# Altium PCB Booster_Common_Channel_RF.PcbDoc (part 2 of 3)
Units mm, origin at the board's own origin, x right, y up, seen from the top; angles counter-clockwise.
Board outline 159.2 x 28.7 mm, 2 copper layers (Top Layer, Bottom Layer), stack 1.071 mm thick; 192 components, 112 nets, 503 pads, 509 vias.
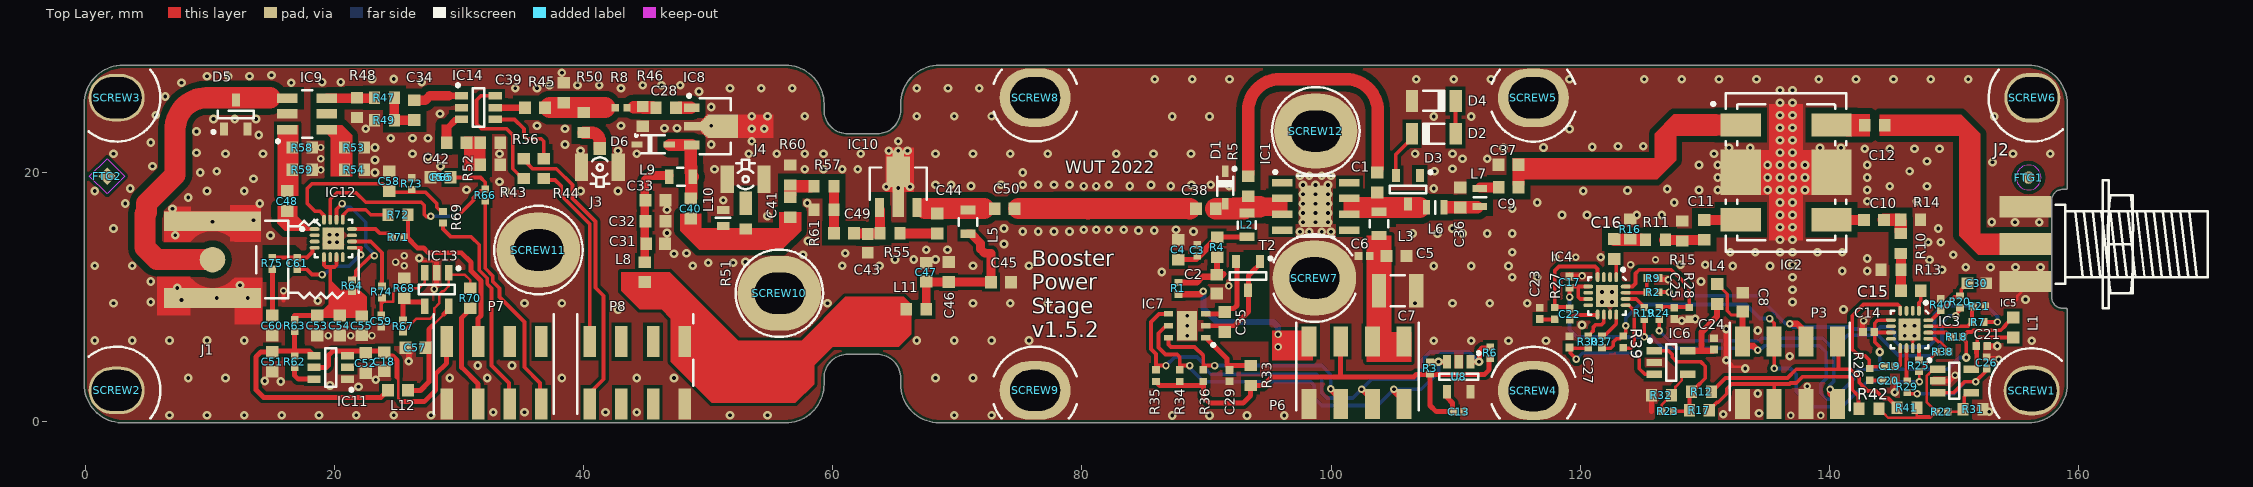
[diagram p0: Top Layer view]

## Part data (continued)
L10: library part IND_330NH_2%_COILCRAFT_0603LS, "Inductor With Core", Case=0603, Manufacturer=COILCRAFT, Manufacturer Part Number=0603LS-331XGL, Power=560mA, Resistance=0R46, Tolerance=±2%, Author="CERN DEM BC", ComponentHeight=1.12mm, Component Type=Standard, CreateDate=29.08.2019, HelpURL=\\cern.ch\dfs\Applications\Altium\Datasheets\IND_COILCRAFT_0603LS.pdf, LatestRevisionDate=29.08.2019, Mounted=Yes, Part Description="SMT Chip Inductor", Part Number=IND_330NH_2%_COILCRAFT_0603LS, Pin Count=2, Sense=No, SMD=Yes, Socket=No, Status=None
P3 P6 P7 P8: library part HDR2X4, "Header, 4-Pin, Dual Row", Manufacturer=-, Package="2x4 pin SMD", Generic=yes, Manufacturer Part Number=ZL264-8DG, Mounting type=SMT, Remarks="ordinary goldpin socket", Supplier 1=TME, Supplier 2=-, Supplier 3=-, Supplier Part Number 1=ZL264-8DG, Supplier Part Number 2=-, Supplier Part Number 3=-
R1 R2 R7 R8 R9 R20 R21 R24 R25 R29 R30 R37 R38 R39 R40 R63 R65 R66 R69 R71 R74 R75: library part R0402_0R_JUMPER, "Resistor", Case=0402, Manufacturer=GENERIC, Manufacturer1 ComponentHeight=0.4mm, Manufacturer1 Example="YAGEO PHYCOMP", Manufacturer1 Part Number=232270591001L, Author="CERN DEM JLC", Component Type=Standard, CreateDate=03.12.2007, HelpURL=\\cern.ch\dfs\Applications\Altium\Datasheets\R0402_Phycomp_RC0402.pdf, LatestRevisionDate=17.10.2012, Manufacturer Part Number=R0402_0R_JUMPER, Mounted=Yes, Part Description="1A (0.05R Max DC Resistance) Zero Ohm Jumper", Part Number=R0402_0R_JUMPER, Pin Count=2, PressFit=No, Sense=No, SMD=Yes, Socket=No, Status="Not Recommended"
R3 R6 R18 R19 R22 R23 R28 R34 R35 R36 R62 R64 R67 R73: library part R0402_10k_1%_0.0625W_100PPM, "Resistor - 1%", Case=0402, Manufacturer=GENERIC, Manufacturer1 ComponentHeight=0.4mm, Manufacturer1 Example="YAGEO PHYCOMP", Manufacturer1 Part Number=232270671003L, Manufacturer Part Number=R0402_10K_1%_0.0625W_100PPM, Power=0.0625W, Tolerance=±1%, Author="CERN DEM JLC", Component Type=Standard, CreateDate=03.12.2007, HelpURL=\\cern.ch\dfs\Applications\Altium\Datasheets\R0402_Phycomp_RC0402.pdf, LatestRevisionDate=17.10.2012, Mounted=Yes, Part Description="General Purpose Thick Film Chip Resistor", Part Number=R0402_10K_1%_0.0625W_100PPM, Pin Count=2, PressFit=No, Sense=No, SMD=Yes, Socket=No, Status="Not Recommended", TC=±100ppm/°C
R4 R33: library part R0603_39R_1%_0.1W_100PPM, "Resistor - 1%", Case=0603, Manufacturer=GENERIC, Manufacturer1 ComponentHeight=0.55mm, Manufacturer1 Example="NIC COMPONENT", Manufacturer1 Part Number=NRC06F39R0TRF, Power=0.1W, Tolerance=±1%, Author="CERN DEM JLC", Component Type=Standard, CreateDate=03.12.2007, HelpURL=\\cern.ch\dfs\Applications\Altium\Datasheets\R0603_NIC_NRC.pdf, LatestRevisionDate=13.03.2008, Manufacturer Part Number=R0603_39R_1%_0.1W_100PPM, Mounted=Yes, Part Description="General Purpose Thick Film Chip Resistor", Part Number=R0603_39R_1%_0.1W_100PPM, Pin Count=2, PressFit=No, Sense=No, SMD=Yes, Socket=No, Status=Preferred, TC=±100ppm/°C
R5: library part R0603_750R_1%_0.1W_100PPM, "Resistor - 1%", Case=0603, Manufacturer=GENERIC, Manufacturer1 ComponentHeight=0.55mm, Manufacturer1 Example="NIC COMPONENT", Manufacturer1 Part Number=NRC06F7500TRF, Power=0.1W, Tolerance=±1%, Author="CERN DEM JLC", Component Type=Standard, CreateDate=03.12.2007, HelpURL=\\cern.ch\dfs\Applications\Altium\Datasheets\R0603_NIC_NRC.pdf, LatestRevisionDate=13.03.2008, Manufacturer Part Number=R0603_750R_1%_0.1W_100PPM, Mounted=Yes, Part Description="General Purpose Thick Film Chip Resistor", Part Number=R0603_750R_1%_0.1W_100PPM, Pin Count=2, PressFit=No, Sense=No, SMD=Yes, Socket=No, Status=Preferred, TC=±100ppm/°C
R10 R11: library part R0603_71R5_1%_0.1W_100PPM, "Resistor - 1%", Case=0603, Manufacturer=GENERIC, Manufacturer1 ComponentHeight=0.50mm, Manufacturer1 Example=VISHAY, Manufacturer1 Part Number=CRCW060371R5FKEA, Power=0.1W, Tolerance=±1%, Author="CERN DEM JLC", Component Type=Standard, CreateDate=11.12.2013, HelpURL="\\cern.ch\dfs\Applications\Altium\Datasheets\R0603_VISHAY_CRCW e3.pdf", LatestRevisionDate=11.12.2013, Manufacturer Part Number=R0603_71R5_1%_0.1W_100PPM, Mounted=Yes, Part Description="General Purpose Thick Film Chip Resistor", Part Number=R0603_71R5_1%_0.1W_100PPM, Pin Count=2, PressFit=No, Sense=No, SMD=Yes, Socket=No, Status=Preferred, TC=±100ppm/°C
R12 R42 R45 R46 R50 R51 R72: library part R0603_NO-VALUE, "Resistor", Case=0603, Author="CERN DEM JLC", Component Type=Standard, CreateDate=03.12.2007, HelpURL=Undefined, LatestRevisionDate=13.03.2008, Manufacturer=Undefined, Manufacturer1 ComponentHeight=Undefined, Manufacturer1 Example=Undefined, Manufacturer1 Part Number=Undefined, Manufacturer Part Number=R0603_NO-VALUE, Mounted=No, Part Description="Reserved Footprint For a 0603 (1608) Chip Resistor", Part Number=R0603_NO-VALUE, Pin Count=2, PressFit=No, Sense=No, SMD=Yes, Socket=No, Status=None
R13 R16: library part R0603_46R4_0.1%_0.063W_10PPM, "Resistor - 0.1%", Case=0603, Manufacturer=GENERIC, Manufacturer1 ComponentHeight=0.5mm, Manufacturer1 Example="TYCO HOLSWORTHY", Manufacturer1 Part Number=RN73C1J46R4BTDF, Power=0.063W, Tolerance=±0.1%, Author="CERN DEM JLC", Component Type=Standard, CreateDate=03.12.2007, HelpURL=\\cern.ch\dfs\Applications\Altium\Datasheets\R0603_Tyco_RN73.pdf, LatestRevisionDate=13.03.2008, Manufacturer Part Number=R0603_46R4_0.1%_0.063W_10PPM, Mounted=Yes, Part Description="Thin Film Chip Resistor", Part Number=R0603_46R4_0.1%_0.063W_10PPM, Pin Count=2, PressFit=No, Sense=No, SMD=Yes, Socket=No, Status="Not Recommended", TC=±10ppm
R14 R15: library part R0603_96R5_0.5%_0.1W_50PPM, "Resistor - 0.5%", Case=0603, Manufacturer=GENERIC, Manufacturer1 ComponentHeight=0.55mm, Manufacturer1 Example=Yaego, Manufacturer1 Part Number=RT0603DRE0796R5L, Power=0.1W, Tolerance=±0.5%, Author=GK, Component Type=Standard, CreateDate=03.12.2007, HelpURL=\\cern.ch\dfs\Applications\Altium\Datasheets\R0603_NIC_NRC.pdf, LatestRevisionDate=13.03.2008, Manufacturer Part Number=R0603_96R5_0.5%_0.1W_50PPM, Mounted=Yes, Part Description="General Purpose Thick Film Chip Resistor", Part Number=R0603_96R5_0.5%_0.1W_50PPM, Pin Count=2, PressFit=No, Sense=No, SMD=Yes, Socket=No, Status=Preferred, TC=±50ppm/°C
R17 R41 R43 R44 R52 R53 R54 R56 R70: library part R0603_100R_1%_0.1W_100PPM, "Resistor - 1%", Case=0603, Manufacturer=GENERIC, Manufacturer1 ComponentHeight=0.55mm, Manufacturer1 Example="NIC COMPONENT", Manufacturer1 Part Number=NRC06F4700TRF, Power=0.1W, Tolerance=±1%, Author="CERN DEM JLC", Component Type=Standard, CreateDate=03.12.2007, HelpURL=\\cern.ch\dfs\Applications\Altium\Datasheets\R0603_NIC_NRC.pdf, LatestRevisionDate=13.03.2008, Manufacturer Part Number=R0603_100R_1%_0.1W_100PPM, Mounted=Yes, Part Description="General Purpose Thick Film Chip Resistor", Part Number=R0603_100R_1%_0.1W_100PPM, Pin Count=2, PressFit=No, Sense=No, SMD=Yes, Socket=No, Status=Preferred, TC=±100ppm/°C
R26 R27: library part R0402_3R9_1%_0.0625W_200PPM, "Resistor - 1%", Case=0402, Manufacturer=GENERIC, Manufacturer1 ComponentHeight=0.4mm, Manufacturer1 Example="YAGEO PHYCOMP", Manufacturer1 Part Number=232270673908L, Power=0.0625W, Tolerance=±1%, Author="CERN DEM JLC", Component Type=Standard, CreateDate=03.12.2007, HelpURL=\\cern.ch\dfs\Applications\Altium\Datasheets\R0402_Phycomp_RC0402.pdf, LatestRevisionDate=17.10.2012, Manufacturer Part Number=R0402_3R9_1%_0.0625W_200PPM, Mounted=Yes, Part Description="General Purpose Thick Film Chip Resistor", Part Number=R0402_3R9_1%_0.0625W_200PPM, Pin Count=2, PressFit=No, Sense=No, SMD=Yes, Socket=No, Status="Not Recommended", TC=±200ppm/°C
R31 R32 R68: library part R0603_20K_1%_0.1W_100PPM, "Resistor - 1%", Case=0603, Manufacturer=GENERIC, Manufacturer1 ComponentHeight=0.55mm, Manufacturer1 Example="NIC COMPONENT", Manufacturer1 Part Number=NRC06F2002TRF, Power=0.1W, Tolerance=±1%, Author="CERN DEM JLC", Component Type=Standard, CreateDate=03.12.2007, HelpURL=\\cern.ch\dfs\Applications\Altium\Datasheets\R0603_NIC_NRC.pdf, LatestRevisionDate=13.03.2008, Manufacturer Part Number=R0603_20K_1%_0.1W_100PPM, Mounted=Yes, Part Description="General Purpose Thick Film Chip Resistor", Part Number=R0603_20K_1%_0.1W_100PPM, Pin Count=2, PressFit=No, Sense=No, SMD=Yes, Socket=No, Status=Preferred, TC=±100ppm/°C
R47: library part R0603_30R_1%_0.1W_100PPM, "Resistor - 1%", Case=0603, Manufacturer=GENERIC, Manufacturer1 ComponentHeight=0.55mm, Manufacturer1 Example="NIC COMPONENT", Manufacturer1 Part Number=NRC06F30R0TRF, Power=0.1W, Tolerance=±1%, Author="CERN DEM JLC", Component Type=Standard, CreateDate=03.12.2007, HelpURL=\\cern.ch\dfs\Applications\Altium\Datasheets\R0603_NIC_NRC.pdf, LatestRevisionDate=13.03.2008, Manufacturer Part Number=R0603_30R_1%_0.1W_100PPM, Mounted=Yes, Part Description="General Purpose Thick Film Chip Resistor", Part Number=R0603_30R_1%_0.1W_100PPM, Pin Count=2, PressFit=No, Sense=No, SMD=Yes, Socket=No, Status=Preferred, TC=±100ppm/°C
R48 R49: library part R0603_180R_1%_0.1W_100PPM, "Resistor - 1%", Case=0603, Manufacturer=GENERIC, Manufacturer1 ComponentHeight=0.55mm, Manufacturer1 Example="NIC COMPONENT", Manufacturer1 Part Number=NRC06F1800TRF, Power=0.1W, Tolerance=±1%, Author="CERN DEM JLC", Component Type=Standard, CreateDate=03.12.2007, HelpURL=\\cern.ch\dfs\Applications\Altium\Datasheets\R0603_NIC_NRC.pdf, LatestRevisionDate=13.03.2008, Manufacturer Part Number=R0603_180R_1%_0.1W_100PPM, Mounted=Yes, Part Description="General Purpose Thick Film Chip Resistor", Part Number=R0603_180R_1%_0.1W_100PPM, Pin Count=2, PressFit=No, Sense=No, SMD=Yes, Socket=No, Status=Preferred, TC=±100ppm/°C
R55: library part R0603_1K_1%_0.1W_100PPM, "Resistor - 1%", Case=0603, Manufacturer=GENERIC, Manufacturer1 ComponentHeight=0.55mm, Manufacturer1 Example="NIC COMPONENT", Manufacturer1 Part Number=NRC06F1001TRF, Power=0.1W, Tolerance=±1%, Author="CERN DEM JLC", Component Type=Standard, CreateDate=03.12.2007, HelpURL=\\cern.ch\dfs\Applications\Altium\Datasheets\R0603_NIC_NRC.pdf, LatestRevisionDate=13.03.2008, Manufacturer Part Number=R0603_1K_1%_0.1W_100PPM, Mounted=Yes, Part Description="General Purpose Thick Film Chip Resistor", Part Number=R0603_1K_1%_0.1W_100PPM, Pin Count=2, PressFit=No, Sense=No, SMD=Yes, Socket=No, Status=Preferred, TC=±100ppm/°C
R57: library part R0603_42R2_0.1%_0.063W_10PPM, "Resistor - 0.1%", Case=0603, Manufacturer=GENERIC, Manufacturer1 ComponentHeight=0.5mm, Manufacturer1 Example="TYCO HOLSWORTHY", Manufacturer1 Part Number=RN73C1J42R2BTDF, Power=0.063W, Tolerance=±0.1%, Author="CERN DEM JLC", Component Type=Standard, CreateDate=03.12.2007, HelpURL=\\cern.ch\dfs\Applications\Altium\Datasheets\R0603_Tyco_RN73.pdf, LatestRevisionDate=13.03.2008, Manufacturer Part Number=R0603_42R2_0.1%_0.063W_10PPM, Mounted=Yes, Part Description="Thin Film Chip Resistor", Part Number=R0603_42R2_0.1%_0.063W_10PPM, Pin Count=2, PressFit=No, Sense=No, SMD=Yes, Socket=No, Status="Not Recommended", TC=±10ppm
R58 R59: library part R0603_169R_0.1%_0.063W_10PPM, "Resistor - 0.1%", Case=0603, Manufacturer=GENERIC, Manufacturer1 ComponentHeight=0.5mm, Manufacturer1 Example="TYCO HOLSWORTHY", Manufacturer1 Part Number=RN73C1J169RBTDF, Power=0.063W, Tolerance=±0.1%, Author="CERN DEM JLC", Component Type=Standard, CreateDate=03.12.2007, HelpURL=\\cern.ch\dfs\Applications\Altium\Datasheets\R0603_Tyco_RN73.pdf, LatestRevisionDate=13.03.2008, Manufacturer Part Number=R0603_169R_0.1%_0.063W_10PPM, Mounted=Yes, Part Description="Thin Film Chip Resistor", Part Number=R0603_169R_0.1%_0.063W_10PPM, Pin Count=2, PressFit=No, Sense=No, SMD=Yes, Socket=No, Status="Not Recommended", TC=±10ppm
R60 R61: library part R0603_130R_1%_0.1W_100PPM, "Resistor - 1%", Case=0603, Manufacturer=GENERIC, Manufacturer1 ComponentHeight=0.55mm, Manufacturer1 Example="NIC COMPONENT", Manufacturer1 Part Number=NRC06F1300TRF, Power=0.1W, Tolerance=±1%, Author="CERN DEM JLC", Component Type=Standard, CreateDate=03.12.2007, HelpURL=\\cern.ch\dfs\Applications\Altium\Datasheets\R0603_NIC_NRC.pdf, LatestRevisionDate=13.03.2008, Manufacturer Part Number=R0603_130R_1%_0.1W_100PPM, Mounted=Yes, Part Description="General Purpose Thick Film Chip Resistor", Part Number=R0603_130R_1%_0.1W_100PPM, Pin Count=2, PressFit=No, Sense=No, SMD=Yes, Socket=No, Status=Preferred, TC=±100ppm/°C
SCREW1 SCREW2 SCREW3 SCREW4 SCREW5 SCREW6 SCREW7 SCREW8 SCREW9 SCREW10 SCREW11 SCREW12: library part BOSSARD_BN5687-3061605_v, "Screw", Manufacturer=BOSSARD, Manufacturer Part Number="BN5687 Art.3061605", Author="CERN DEM JLC", Component Type=Mechanical, ComponentHeight=2.4mm, CreateDate=15/01/2013, HelpURL=\\cern.ch\dfs\Applications\Altium\Datasheets\BOSSARD_BN5687-3061605.pdf, LatestRevisionDate=15/01/2013, Mounted=Yes, PackageDescription="M3 L=6mm Hexalobular Socket Pan Head Screw, Fully Threaded - Stainless Steel A2", Part Description="M3 L=6mm Hexalobular Socket Pan Head Screw, Fully Threaded, Stainless Steel A2", Part Number=BOSSARD_BN5687-3061605_v, Pin Count=0, PressFit=No, Sense=No, SMD=No, Socket=No, Status=None
T2: "PNP Transistor", Case=SOT23-3, Manufacturer="ON SEMICONDUCTOR", Author="CERN DEM JLC", Bonding=No, ComponentHeight=1.1mm, Component Type=Standard, CreateDate=29.03.2012, Device=MMBT3906LT1G, HelpURL=\\cern.ch\dfs\Applications\Altium\Datasheets\MMBT3906LT1G.pdf, LatestRevisionDate=29.03.2012, Manufacturer Part Number=MMBT3906LT1G, Mounted=Yes, PackageDescription="SOT23 3-Leads, Pitch 0.95mm - Body 1.4x3mm, IPC Medium Density", Part Description="40V 200mA PNP General Purpose Transistor", Part Number=MMBT3906LT1G, Pin Count=3, PressFit=No, Sense=No, SMD=Yes, Socket=No
U8: library part 24AA01H, "1K I2  C™ Serial EEPROM with Half-Array Write-Protect", Manufacturer=Microchip, Manufacturer Part Number=-, Supplier Part Number 1=579-24AA01HTILT, Generic=no, Mounting type=SMT, Package=-, Remarks=-, Supplier 1=Mouser, Supplier 2=Farnell, Supplier 3=Digikey, Supplier Part Number 2=-, Supplier Part Number 3=24AA01HT-I/LTCT-ND

## Free pads (board coordinates)
  oval 4.5x3.8 hole 3.3 slot 4 at 0 deg mask+1: 0(2.5,2.478) 1(2.5,25.978)
  oval 4.5x4 hole 3.3 slot 4 at 0 deg mask+0.9: 1(156.25,2.468) 2(156.31,25.978)
  oval 5.7x4.7 hole 3.3 slot 4 at 0 deg mask+0.6: 2(76.25,2.478) 3(76.25,25.978) 6(116.25,2.468) 7(116.25,25.968)
  oval 6.7x6 hole 3.3 slot 4 at 0 deg: 4(36.37,13.748) 4(98.67,11.498) 5(55.71,10.278) 5(98.77,23.298)

## Via types
v1: diameter 0.7, hole 0.3, Top Layer to Bottom Layer, tented both sides, 449 vias
v2: diameter 0.6, hole 0.3, Top Layer to Bottom Layer, tented both sides, 60 vias

## Nets (pads, with @x,y where several pads share a name; then routed paths per layer and width w, separated by ;. In a path a pad name is that pad's centre, name@x,y a point inside that pad or via, vN(x,y) a via of type N, cw(c..) or ccw(c..) an arc to the next point about the centre after c; other vN are vias at no path point)
ADL_Q: P7.6 R71.1 R72.2 | length 14.6
  Top Layer w0.3: 25.9,14.778 R72.2@25.9,16.578
  Top Layer w0.4: R71.1@25.85,14.728 26.65,13.928 27.143,13.928 27.25,13.821 27.543,13.528 30.18,13.528 30.966,12.742 30.966,12.06 31.752,11.274 31.752,8.482 31.53,8.26 P7.6@31.53,6.478 ; P7.6@31.23,6.278 P7.6@31.23,6.478
ADL_RST: P7.1 R66.1 | length 18
  Top Layer w0.3: R66.1@32.1,17.688 32.1,12.277 32.707,11.669 32.707,11.217 33.25,10.674 33.25,9.978 35.25,7.978 35.25,4.328 36.5,3.078 P7.1@36.5,1.468
ADL_VREF: P7.3 R69.1 | length 17.5
  Top Layer w0.3: R69.1@28.7,15.896 28.7,15.443 29.34,14.803 30.975,14.803 31.615,14.163 31.615,12.122 32.255,11.482 32.255,11.03 32.6,10.684 32.6,4.478 34,3.078 P7.3@34,1.508
ALERT: IC7.6 P6.5 R36.2 | length 17.3
  Top Layer w0.3: IC7.6@86.95,6.728 86.95,6.168 87.147,5.971 89.047,5.971 89.75,5.268 89.75,4.468 v2(90.65,4.468) ; v2(99.98,2.598) 99.98,2.438 P6.5@100.65,1.768
  Bottom Layer w0.3: v2(90.65,4.468) 99.25,4.468 99.98,3.738 v2(99.98,2.598)
FWD_Q: P3.6 R25.1 R37.1 R38.1 R39.1 | length 38
  Top Layer w0.203: R25.1@147.2,3.988 147.235,3.953 v2(147.235,3.168) ; R25.1@147.35,3.988 147.35,4.118 147.821,4.589 147.821,4.719 148.659,5.558 R38.1@148.659,5.578
  Top Layer w0.3: R37.1@121.75,5.868 122.45,5.868 122.65,6.068 122.65,6.354 122.914,6.618 123.2,6.618 123.65,7.068 v2(123.65,7.668) ; v2(135.206,8.244) 135.578,7.872 135.578,6.07 135.58,6.068 v2(135.58,4.238) ; v2(147.235,3.168) v2@147.293,3.225
  Bottom Layer w0.3: v2(123.65,7.668) 123.65,8.268 124.75,9.368 133.31,9.368 134.434,8.244 v2(135.206,8.244) ; v2(135.58,4.238) 136.88,4.238 137.35,3.768 137.35,2.368 138.55,1.168 141.05,1.168 143.05,3.168 v2(147.235,3.168)
FWD_RST: P3.4 R2.2 R7.2 | length 35.8
  Top Layer w0.3: R2.2@126.35,10.368 v2(127.15,10.368) ; 152.75,7.968 v2(153.5,7.968)
  Top Layer w0.5: v2(136.82,7.828) 137.418,7.828 137.77,7.475 137.77,6.978 P3.4@138.15,6.598
  Bottom Layer w0.3: v2(127.15,10.368) 127.45,10.068 134.25,10.068 136.49,7.828 v2(136.82,7.828) 137.079,7.568 141.801,7.568 141.956,7.413 143.944,7.413 144.099,7.568 144.85,7.568 145.25,7.168 145.25,6.468 145.75,5.968 147.95,5.968 148.45,6.468 148.45,8.568 149.15,9.268 152.65,9.268 153.5,8.418 v2(153.5,7.968)
FWD_VREF: P3.1 R20.1 R24.1 | length 34
  Top Layer w0.3: v2(126.35,7.268) R24.1@126.35,8.168 ; v2(150.15,8.468) 150.15,8.568 R20.1@150.45,8.868
  Top Layer w0.5: v2(140.06,2.558) 140.06,2.258 P3.1@140.65,1.668
  Bottom Layer w0.3: v2(126.35,7.268) 127.15,6.468 134.35,6.468 134.55,6.668 139.474,6.668 140.35,5.792 ; v2(140.06,2.558) 140.06,2.888 140.35,3.178 140.35,5.792 ; v2(150.15,8.468) 149.597,8.468 149.05,7.92 149.05,6.156 148.162,5.268 145.55,5.268 143.908,6.91 141.467,6.91 140.35,5.792